# Altium PCB FLYBACK_SWITCHING_POWER_SUPPLY_V1_2.PcbDoc
Units mil, origin at the board's own origin, x right, y up, seen from the top; angles counter-clockwise.
Board outline 2450 x 1150 mil, 2 copper layers (Top Layer, Bottom Layer); 21 components, 16 nets, 56 pads, 0 vias.
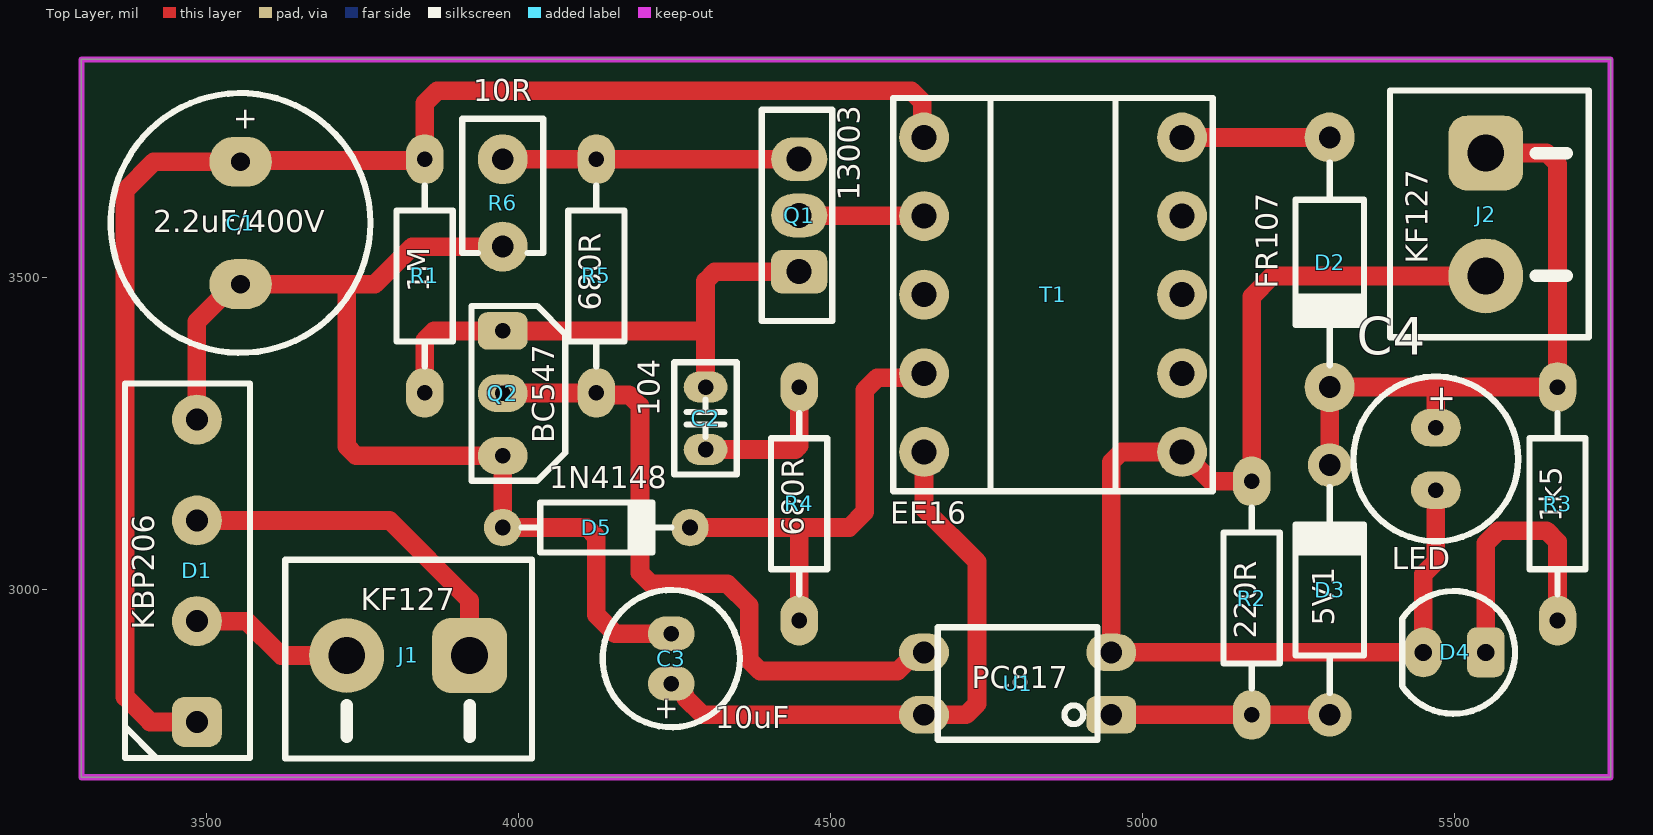
[diagram p0: Top Layer view]
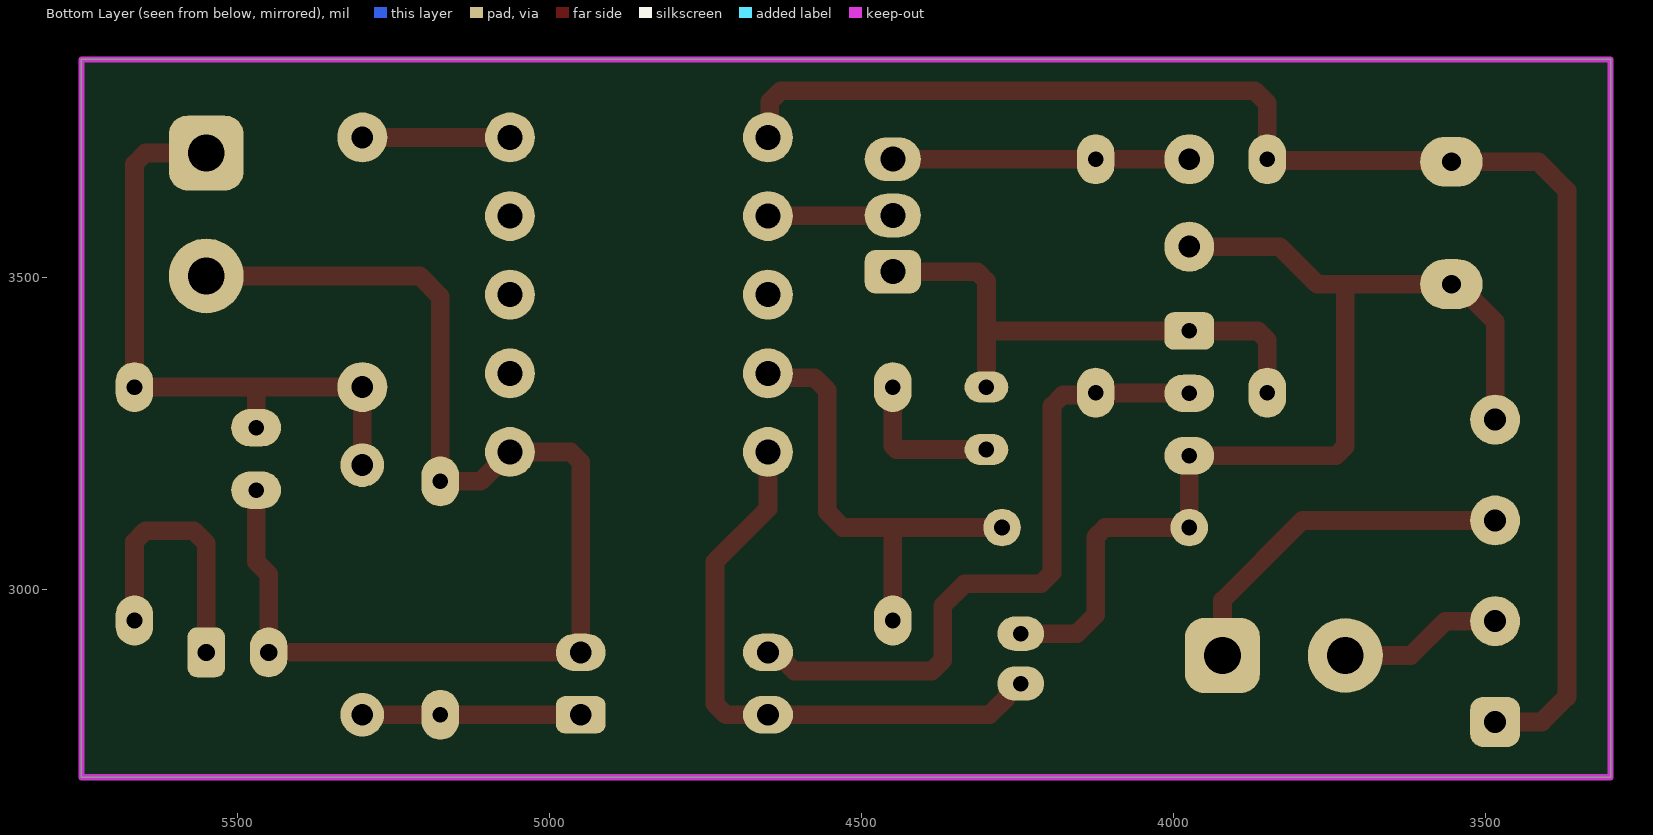
[diagram p1: Bottom Layer view, seen from below]
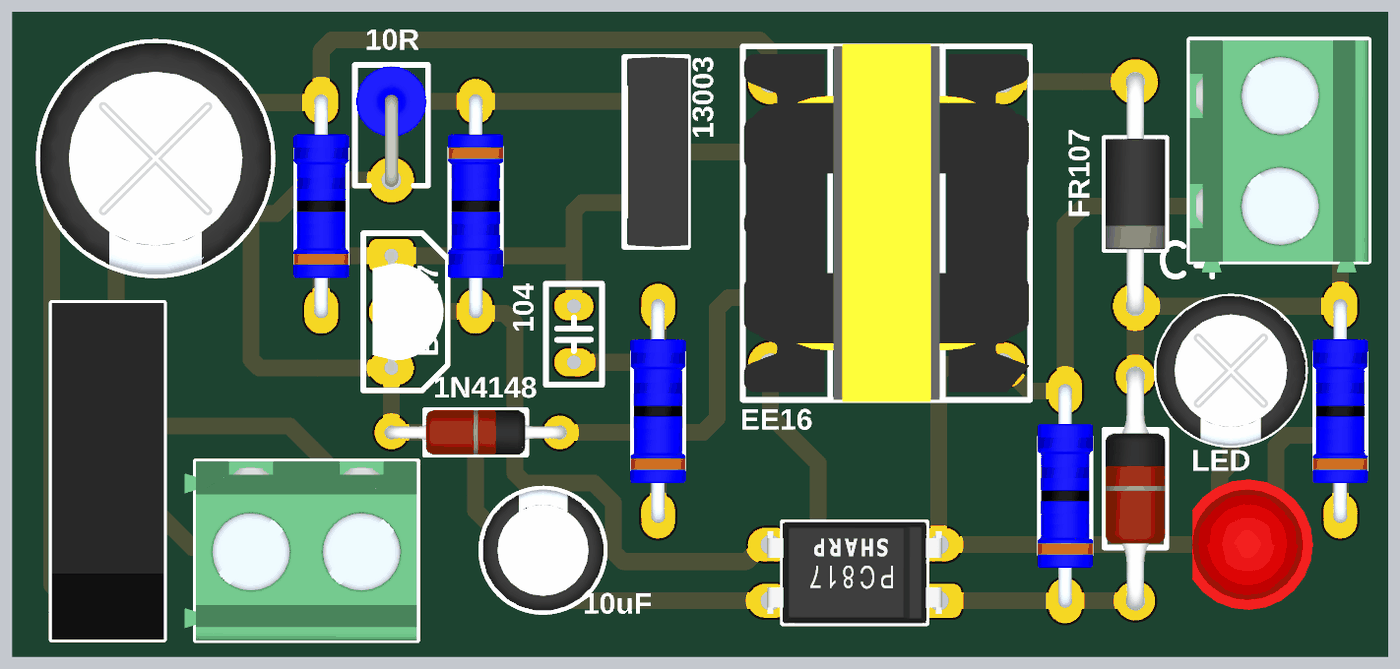
[diagram p2: 3D render of the assembled board from above, using the file's embedded part models]

## Layer stack, top to bottom
Top Solder: solder mask 0.4, Solder Resist, Dk 3.5
Top Layer: signal copper 1.4
Dielectric 1: dielectric 12.6, FR-4, Dk 4.8
Bottom Layer: signal copper 1.4
Bottom Solder: solder mask 0.4, Solder Resist, Dk 3.5

## Board outline
3300,2700 5750,2700 5750,3850 3300,3850

## Design rules (kind name [scope] priority, off if disabled: settings)
Clearance [All] p1: gap=10 ignorepadtopadclearanceinfootprint=FALSE except(0: Arc-Hole Track-Hole SMDPad-Hole THPad-Hole Via-Hole Fill-Hole Poly-Hole Region-Hole Text-Hole)
PolygonConnect [All] p1: connectstyle=Relief reliefconductorwidth=10 reliefentries=4 polygonreliefangle="90 Angle" airgapwidth=10
RoutingVias [All] p1: holewidth=28 width=50 viastyle="Through Hole" minholewidth=28 minwidth=50 maxholewidth=28 maxwidth=50
SolderMaskExpansion [All] p1: expansion=4 istentingtop=FALSE
Width [All] p1: maxlimit=50 minlimit=10 preferedwidth=30
30 further rules are at their usual default settings.

## Components (designator, comment, footprint, x,y, rotation, side; value= is the part's Value field where it differs from the comment)
C1 "2.2uF/400V" CAP_RAD_D10x12.5 3555,3588 r270 top
C2 "104" CAP_Ceramic_2.5MM 4300,3275 r90 top
C3 "10uF" CAP_RAD_D05x11 4245,2890 r90 top
C4 "470uF" CAP_RAD_D06.3x11 5470,3210 r270 top
D1 "KBP206" DIODE-KBP206 3485,3030.71 r90 top
D2 "FR107" DO-204AL-BK 5300,3525 r270 top
D3 "5V1" DO-204AL-RD 5300,3000 r90 top
D4 "LED" LED_5MM 5500,2900 r180 top
D5 "1N4148" DO-204AH-RD 4125,3100 r0 top
J1 "KF127" DG127-5.0-02P-14-00AH 3921.85,2895 r180 top
J2 "KF127" DG127-5.0-02P-14-00AH 5550,3700 r270 top
Q1 "13003" TO-126 4450,3600 r90 top
Q2 "BC547" TO-92 3975,3315 r270 top
R1 "1M" RES-0.25W-H 3850,3503 r90 top
R2 "220R" RES-0.25W-H 5175,2987 r90 top
R3 "1k5" RES-0.25W-H 5665,3138 r90 top
R4 "680R" RES-0.25W-H 4450,3138 r90 top
R5 "680R" RES-0.25W-H 4125,3503 r270 top
R6 "10R" RES-0.5W-V 3975,3690 r270 top
T1 "EE16" TRANSFORMERS-EE16(5+5)-H 4856.69,3473.03 r0 top
U1 "PC817" PC817-DIP 4800,2850 r180 top

## Footprints (in the part's own frame and the unit in brackets; to place one, negate y for a bottom-side part, rotate by r counter-clockwise, add the part's x,y. Pads: shape width x height; smd on the part's side, far side on the other; paste and mask are expansions set on the pad)
CAP_Ceramic_2.5MM [mil]
  oval 50x70 hole 25: 1(-50,0) 2(50,0)
  silkscreen extent -90,-50 90,50, body extent -92,-49 92,49, height 289
CAP_RAD_D05x11 [mil]
  oval 55x75 hole 25: 1(-40,0) 2(40,0)
  silkscreen extent -110,-110 110,110, body extent -108,-108 108,108, height 492
CAP_RAD_D06.3x11 [mil]
  oval 60x80 hole 25: 1(-50,0) 2(50,0)
  silkscreen extent -132,-132 132,132, body extent -134,-134 134,134, height 492
CAP_RAD_D10x12.5 [mil]
  oval 80x100 hole 30: 1(-98,0) 2(98,0)
  silkscreen extent -208,-208 208,208, body extent -207,-207 207,207, height 551
DG127-5.0-02P-14-00AH [mil]
  rrect50% 120x120 hole 59.06: 1(0,0)
  round 120 hole 59.06: 2(196.85,0)
  silkscreen extent -100,-154 295,165, body extent -98,-154 315,165, height 398
DIODE-KBP206 [mil]
  rrect50% 80x80 hole 35: 1(-242.13,0)
  round 80 hole 35: 2(-80.71,0) 3(80.71,0) 4(242.13,0)
  silkscreen extent -300,-85 300,115, body extent -300,-85 300,115, height 530
DO-204AH-RD [mil]
  round 60 hole 25: 1(-150,0) 2(150,0)
  silkscreen extent -120,-40 120,40, body extent -161,-39 161,39, height 82
DO-204AL-BK [mil]
  round 80 hole 35: 1(-200,0) 2(200,0)
  silkscreen extent -160,-55 165,55, body extent -216,-53 216,53, height 110
DO-204AL-RD [mil]
  round 70 hole 35: 1(-200,0) 2(200,0)
  silkscreen extent -165,-55 165,55, body extent -216,-53 216,53, height 110
LED_5MM [mil]
  rrect50% 60x80 hole 27.56: 1(-50,0)
  oval 60x80 hole 27.56: 2(50,0)
  silkscreen extent -97,-98 84,98, body extent -116,-116 98,116, height 339
PC817-DIP [mil]
  rrect50% 80x60 hole 35: 1(-150,50)
  oval 80x60 hole 35: 2(-150,-50) 3(150,-50) 4(150,50)
  silkscreen extent -128,-90 128,90, body extent -155,-90 155,90, height 169
RES-0.5W-V [mil]
  round 80 hole 35: 1(0,0) 2(140,0)
  silkscreen extent -65,-65 150,65, body extent -63,-63 152,63, height 453
RES-0.25W-H [mil]
  oval 80x60 hole 25: 1(-187,0) 2(187,0)
  silkscreen extent -145,-45 145,45, body extent -199,-49 199,49, height 109
TO-92 [mil]
  rrect50% 60x80 hole 25: 1(-100,0)
  oval 60x80 hole 25: 2(0,0) 3(100,0)
  silkscreen extent -140,-50 140,100, body extent -107,-33 107,93, height 319
TO-126 [mil]
  rrect50% 70x90 hole 40: 1(-90.16,0)
  oval 70x90 hole 40: 2(0,0) 3(90.16,0)
  silkscreen extent -169,-53 169,60, body extent -169,-53 169,55, height 622
TRANSFORMERS-EE16(5+5)-H [mil]
  round 80 hole 40: 1(-206.69,251.97) 2(-206.69,125.98) 3(-206.69,0) 4(-206.69,-125.98) 5(-206.69,-251.97) 6(206.69,-251.97) 7(206.69,-125.98) 8(206.69,0) 9(206.69,125.98) 10(206.69,251.97)
  silkscreen extent -256,-315 256,315, body extent -254,-319 255,319, height 573

## Part data
C1 C3 C4: library part Capacitor(Radian)
C2: library part Capacitors(Disc)
D1: library part Diode-KBP206
D2: library part Diode-FR107, "1A 1000V"
D3: library part Diode-Zener
D4: library part "LED 5MM"
D5: library part Diode-1N4148, "The fast switching diode"
J1 J2: library part DG127-5.0-02P-14-00AH
Q1: library part Transistor-MJE13003
Q2: library part Transistor-BC547, "VCEO: 45 Vdc / VCBO: 50 Vdc / VEBO: 6.0 Vdc"
R1 R2 R3 R4 R5 R6: library part "Resistors THD"
T1: library part TRANS-EE16-HORIZONTAL(5+5)
U1: library part Opto-PC817

## Nets (pads, with @x,y where several pads share a name; then routed paths per layer and width w, separated by ;. In a path a pad name is that pad's centre, name@x,y a point inside that pad or via, vN(x,y) a via of type N, cw(c..) or ccw(c..) an arc to the next point about the centre after c; other vN are vias at no path point)
NetC1_1: C1.1 D1.1 R1.2 T1.1 | length 2405.1
  Top Layer w30: D1.1 3410,2788.58 3370,2828.58 3370,3640 3416,3686 C1.1 3557,3688 3848,3688 R1.2 3850,3780 3870,3800 4629.64,3800 4647.22,3782.43 4647.22,3727.78 T1.1
NetC1_2: C1.2 C3.2 D1.4 D5.1 Q2.3 R6.2 | length 1741.7
  Top Layer w30: D1.4 3485,3430 3545,3490 C1.2 3725,3490 ; R6.2 3830,3550 3770,3490 3725,3490 ; C3.2 4155,2930 4125,2960 4125,3085 4110,3100 D5.1 Q2.3 3740,3215 3725,3230 3725,3490
NetC2_1: C2.1 R4.2 | length 246.6
  Top Layer w30: C2.1 4444.14,3225 4450,3230.86 R4.2
NetC2_2: C2.2 Q1.1 Q2.1 R1.1 | length 868.4
  Top Layer w30: R1.1 3850,3400 3865,3415 Q2.1 4295,3415 4300,3410 ; C2.2 4300,3410 ; Q1.1 4314.84,3509.84 4300,3495 4300,3410
NetC3_1: C3.1 T1.5 U1.4 | length 958.6
  Top Layer w30: C3.1 4248.24,2850 4267.5,2830.74 4267.5,2827.5 4295,2800 U1.4 4717.43,2800 4735,2817.57 4735,3045 4650,3130 T1.5
NetC4_1: C4.1 D2.2 D3.2 J2.1 R3.2 | length 1034.7
  Top Layer w30: D3.2 D2.2 5470,3325 ; C4.1 5470,3325 ; J2.1 5647.43,3700 5665,3682.43 R3.2 5470,3325
NetC4_2: C4.2 D4.2 J2.2 R2.2 T1.6 U1.2 | length 2009.2
  Top Layer w30: C4.2 5470,3045 5450,3025 D4.2 U1.2 4950,3205 4966.06,3221.06 T1.6 5110.45,3174 R2.2 5175,3470 5208.15,3503.15 J2.2
NetD1_2: D1.2 J1.2 | length 262.8
  Top Layer w30: D1.2 3565,2950 3620,2895 J1.2
NetD1_3: D1.3 J1.1 | length 578.1
  Top Layer w30: D1.3 3793.58,3111.42 3921.85,2983.15 J1.1
NetD2_1: D2.1 T1.10 | length 236.6
  Top Layer w30: T1.10 D2.1
NetD3_1: D3.1 R2.1 U1.1 | length 350
  Top Layer w30: U1.1 R2.1 D3.1
NetD4_1: D4.1 R3.1 | length 432
  Top Layer w30: D4.1 5550,3075 5570,3095 5647.43,3095 5665,3077.43 R3.1
NetD5_2: D5.2 R4.1 T1.4 | length 740.6
  Top Layer w30: D5.2 4450,3100 ; R4.1 4450,3100 ; T1.4 4642.95,3340 4575,3340 4555,3320 4555,3125 4530,3100 4450,3100
NetQ1_2: Q1.2 T1.2 | length 200.4
  Top Layer w30: Q1.2 4450.49,3599.51 4649.51,3599.51 T1.2
NetQ1_3: Q1.3 R5.1 R6.1 | length 475.1
  Top Layer w30: R6.1 R5.1 4125.08,3690.08 4449.92,3690.08 Q1.3
NetQ2_2: Q2.2 R5.2 U1.3 | length 1080.3
  Top Layer w30: Q2.2 3975.5,3315.5 4124.5,3315.5 R5.2 4128.64,3312.36 4177.43,3312.36 4195,3294.79 4195,3027.57 4212.57,3010 4335,3010 4370,2975 4370,2887.57 4387.57,2870 4607.43,2870 4637.43,2900 U1.3
pads on no net: T1.3 T1.7 T1.8 T1.9

## Keep-outs
Keep-Out Layer:
  lines w10: 3300,2700 3300,3850 5750,3850 5750,2750 5750,2700 3300,2700

## Text inside footprints (layer, text, board x,y; h text height)
C1: Top Overlay "+" at 3536.07,3774.43 h60 r270
C3: Top Overlay "+" at 4263.93,2788.57 h60 r90
C4: Top Overlay "+" at 5447.9,3329.68 h70 r270